# Altium PCB STM32.PcbDoc
Units mil, origin at the board's own origin, x right, y up, seen from the top; angles counter-clockwise.
Board outline 2100 x 900 mil, 2 copper layers (Top Layer, Bottom Layer); 35 components, 51 nets, 172 pads, 35 vias.
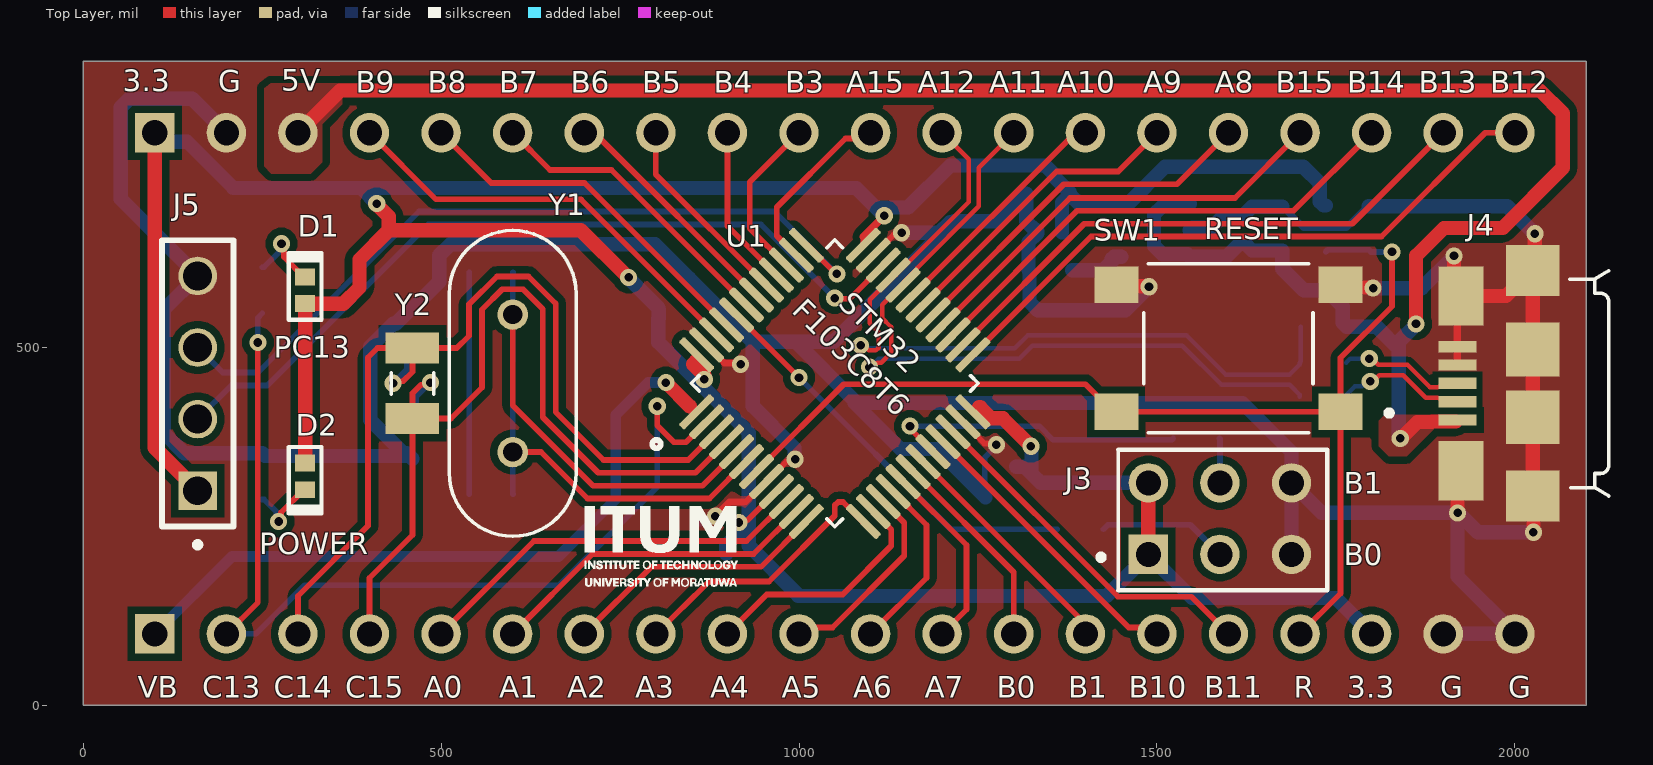
[diagram p0: Top Layer view]
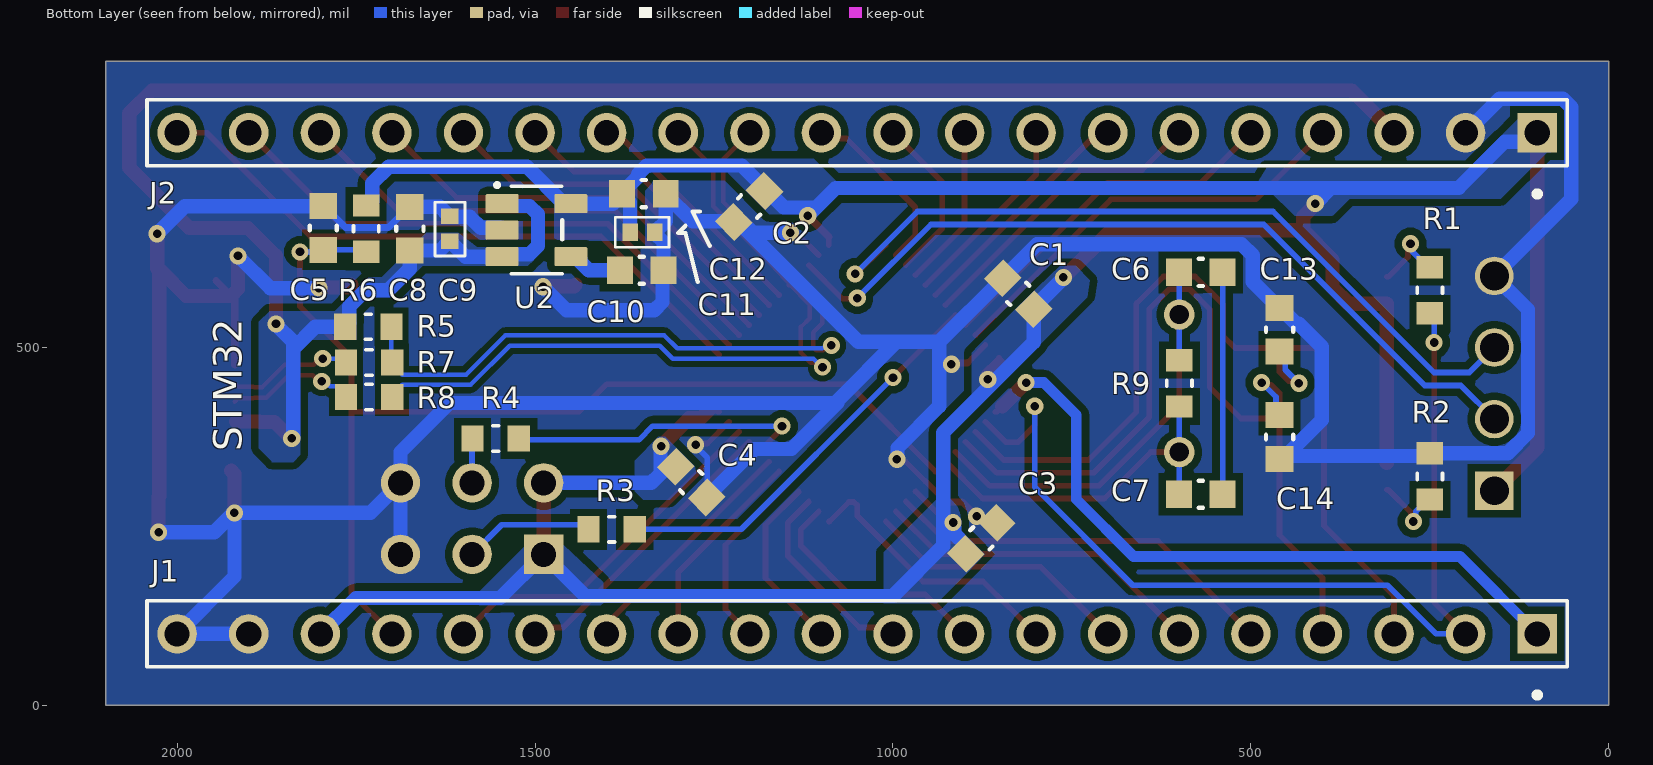
[diagram p1: Bottom Layer view, seen from below]
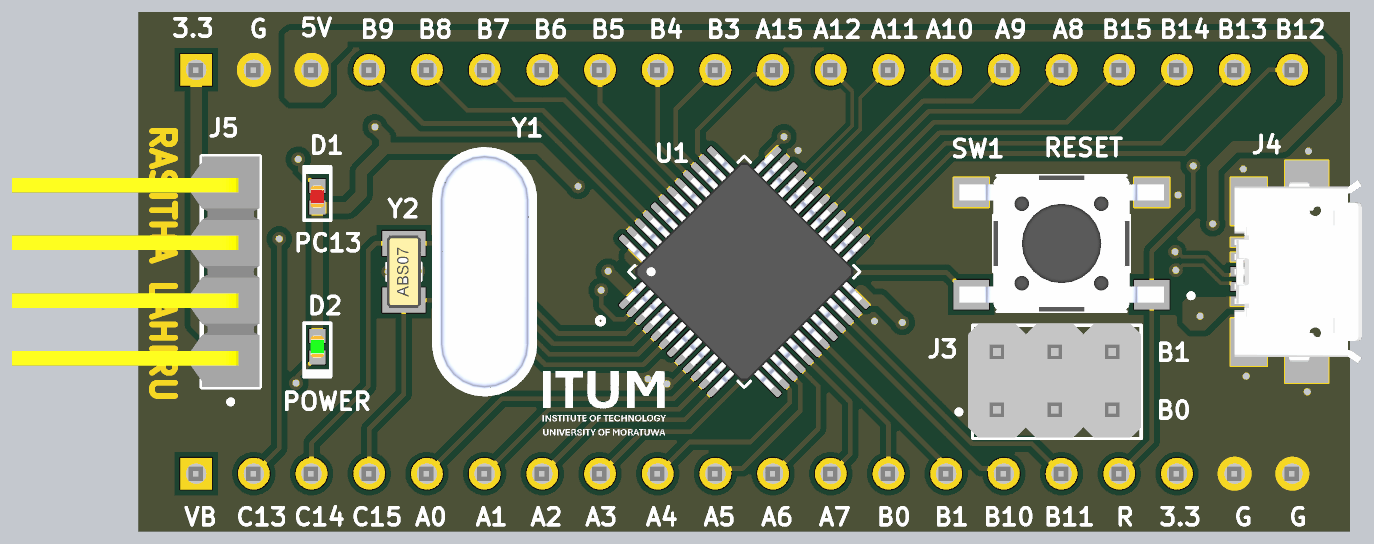
[diagram p2: 3D render of the assembled board from above, using the file's embedded part models]
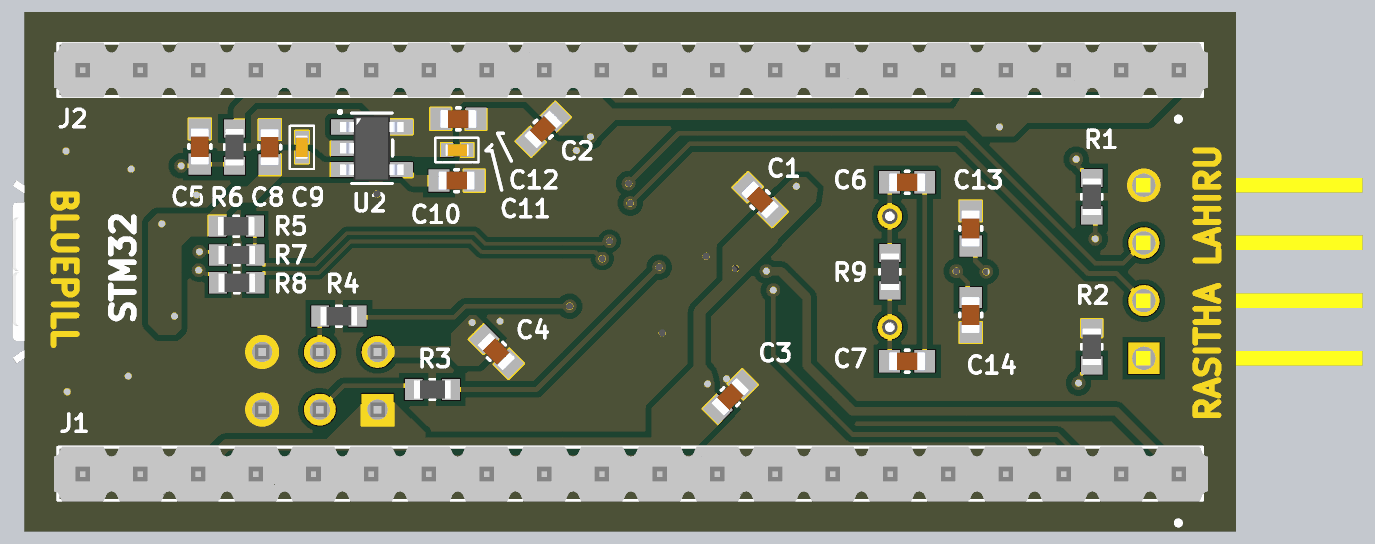
[diagram p3: 3D render of the assembled board from below, using the file's embedded part models]

## Layer stack, top to bottom
Top Solder: solder mask 0.4, Solder Resist, Dk 3.5
Top Layer: signal copper 1.4
Dielectric 1: dielectric 12.6, FR-4, Dk 4.8
Bottom Layer: signal copper 1.4
Bottom Solder: solder mask 0.4, Solder Resist, Dk 3.5

## Board outline
0,0 0,900 2100,900 2100,0

## Design rules (kind name [scope] priority, off if disabled: settings)
Clearance ITUM [WithinRoom('ITUM STK')] p1: gap=0 ignorepadtopadclearanceinfootprint=TRUE
Clearance Cleadiff [(InDifferentialPairClass('All Differential Pairs'))] p2: gap=8 ignorepadtopadclearanceinfootprint=TRUE
Clearance [All] p3: gap=10 ignorepadtopadclearanceinfootprint=TRUE except(6: SMDPad-SMDPad)
DiffPairsRouting [All] p1: maxlimit=8.33 minlimit=8 mostfreqgap=8.1 toplayer_minwidth=6.03 toplayer_maxwidth=6.33 toplayer_prefwidth=6.2 bottomlayer_minwidth=6.03 bottomlayer_maxwidth=6.33 bottomlayer_prefwidth=6.2 maxuncoupledlength=500
MinimumSolderMaskSliver [All] p1: minsoldermaskwidth=4
PolygonConnect [All] p1: connectstyle=Direct reliefconductorwidth=10 reliefentries=4 polygonreliefangle="90 Angle" airgapwidth=10
RoutingVias [All] p1: holewidth=12 width=24 viastyle="Through Hole" minholewidth=12 minwidth=24 maxholewidth=12 maxwidth=24
SilkToSolderMaskClearance ITUM_1 [WithinRoom('ITUM STK')] p1: minsilkscreentomaskgap=0 clearancetoexposedcopper=TRUE
SilkToSolderMaskClearance [IsPad] p2: minsilkscreentomaskgap=6 clearancetoexposedcopper=TRUE
SolderMaskExpansion [All] p1: expansion=2 istentingtop=FALSE
SupplyNets "Schematic Supply Nets_2" [InNet('5V')] p1: voltage=0.000
SupplyNets "Schematic Supply Nets_1" [InNet('3V3')] p2: voltage=0.000
SupplyNets "Schematic Supply Nets" [InNet('GND')] p3: voltage=0.000
Width [All] p1: maxlimit=100 minlimit=6 preferedwidth=10
27 further rules are at their usual default settings.

## Classes and differential pairs
differential pair USB: +USB_P -USB_N
differential pair D: +D_P -D_N

## Components (designator, comment, footprint, x,y, rotation, side; value= is the part's Value field where it differs from the comment)
C1 "104" "CAP 0603" 825,575 r225 bottom locked
C2 "104" "CAP 0603" 1201,697 r135 bottom locked
C3 "104" "CAP 0603" 876.58,233.42 r315 bottom locked
C4 "104" "CAP 0603" 1282,312 r45 bottom locked
C5 "105" "CAP 0603" 1796,667 r270 bottom locked
C6 "20p" "CAP 0603" 570,605 r0 bottom locked
C7 "20p" "CAP 0603" 570,295 r0 bottom locked
C8 "104" "CAP 0603" 1675,666 r270 bottom locked
C9 "105" "CAP 0805" 1619,666 r270 bottom locked
C10 "223" "CAP 0603" 1351,608 r0 bottom locked
C11 "105" "CAP 0805" 1350,661 r0 bottom locked
C12 "104" "CAP 0603" 1348,715 r0 bottom locked
C13 "20p" "CAP 0603" 460,525 r270 bottom locked
C14 "20p" "CAP 0603" 460,375 r90 bottom locked
D1 "red led" "RED LED" 310,580 r270 top locked
D2 "green led" "LED GREEN" 310,320 r90 top locked
J1 "20 header" "20*1 HEADER" 1050,100 r0 bottom locked
J2 "20 header" "20*1 HEADER" 1050,800 r0 bottom locked
J3 "2*3 header" "2*3 HEADER" 1488,311 r0 top locked
J4 "micro b usb" "MICRO-B USB" 2025,450 r90 top locked
J5 "4 header" "4 HEADER" 50,450 r270 top locked
R1 "510R" "RES 0603" 250,580 r270 bottom locked
R2 "510R" "RES 0603" 250,320 r90 bottom locked
R3 "100K" "RES 0603" 1393,246 r0 bottom locked
R4 "100K" "RES 0603" 1555,373 r180 bottom locked
R5 "4.7k" "RES 0603" 1733,529 r180 bottom locked
R6 "10K" "RES 0603" 1736,666 r90 bottom locked
R7 "20R" "RES 0603" 1732,479 r0 bottom locked
R8 "20R" "RES 0603" 1732,431 r0 bottom locked
R9 "10Mohm" "RES 0603" 600,450 r90 bottom locked
SW1 "button" BUTTON 1600,498 r180 top locked
U1 "stm32" STM32 1050,450 r45 top locked
U2 "reguleter" REGULETER 1498,664 r180 bottom locked
Y1 "8 MHz 22pf" "8MHZ CRISTAL" 600,450 r90 top locked
Y2 "32.768Khz" 32.768KHZ 460,450 r90 top locked

## Footprints (in the part's own frame and the unit in brackets; to place one, negate y for a bottom-side part, rotate by r counter-clockwise, add the part's x,y. Pads: shape width x height; smd on the part's side, far side on the other; paste and mask are expansions set on the pad)
"2*3 HEADER" [mm]
  rect 1.398x1.398 hole 0.89: 1(0,-2.54)
  round 1.398 hole 0.89: 2(0,0) 3(2.54,-2.54) 4(2.54,0) 5(5.08,-2.54) 6(5.08,0)
  silkscreen extent -1.78,-3.81 6.35,1.17, body extent -1.27,-3.77 6.35,1.23, height 8.61
"4 HEADER" [mm]
  rect 1.37x1.37 / inner round 1.37 / far side rect 1.37x1.37 hole 1.02: 1(3.81,2.79)
  round 1.37 hole 1.02: 2(1.27,2.79) 3(-1.27,2.79) 4(-3.81,2.79)
  silkscreen extent -5.08,1.52 5.83,4.06, body extent -5.08,-6.83 5.08,4.06, height 4.39
"8MHZ CRISTAL" [mm]
  round 1.08 hole 0.68: 1(-2.44,0) 2(2.44,0)
  silkscreen extent -5.43,-2.25 5.43,2.25, body extent -5.43,-2.25 5.43,2.25, height 3.68
"20*1 HEADER" [mm]
  rect 1.398x1.398 hole 0.89: 1(-24.13,0)
  round 1.398 hole 0.89: 2(-21.59,0) 3(-19.05,0) 4(-16.51,0) 5(-13.97,0) 6(-11.43,0) 7(-8.89,0) 8(-6.35,0) 9(-3.81,0) 10(-1.27,0) 11(1.27,0) 12(3.81,0) 13(6.35,0) 14(8.89,0) 15(11.43,0) 16(13.97,0) 17(16.51,0) 18(19.05,0) 19(21.59,0) 20(24.13,0)
  silkscreen extent -25.2,-1.17 25.2,2.27, body extent -25.43,-1.19 25.37,1.22, height 8.39
32.768KHZ [mm]
  rect 1.1x1.9 smd: 1(-1.25,0) 2(1.25,0)
  silkscreen extent -0.38,-0.75 0.38,0.75, body extent -1.6,-0.75 1.6,0.75, height 0.89
BUTTON [mm]
  rect 1.55x1.3 smd: 1(-3.975,2.225) 2(3.975,2.225) 3(-3.975,-2.275) 4(3.975,-2.275)
  silkscreen extent -5.8,-3.02 3,2.98, body extent -4.5,-3.02 4.5,2.98, height 4.3
"CAP 0603" [mm]
  rect 0.92x0.98 smd: 1(-0.775,0) 2(0.775,0)
  silkscreen extent -0.08,-0.48 0.08,0.48, body extent -0.8,-0.41 0.8,0.41, height 0.94
"CAP 0805" [mm] "Chip Capacitor, 2-Leads, Body 1.00x0.50mm, IPC Medium Density"
  rect 0.55x0.62 smd: 1(-0.44,0) 2(0.44,0)
  silkscreen extent -0.94,-0.53 0.97,0.53, body extent -0.53,-0.28 0.53,0.28, height 0.55
"LED GREEN" [mm]
  rect 0.6x0.7 smd: 1(-0.475,0) 2(0.475,0)
  silkscreen extent -1.32,-0.58 1.04,0.58, body extent -0.5,-0.3 0.5,0.3, height 0.21
"MICRO-B USB" [mm]
  rect 0.4x1.35 smd: 1(-1.3,2.675) 2(-0.65,2.675) 3(0,2.675) 4(0.65,2.675) 5(1.3,2.675)
  rect 2.1x1.6 smd: SH1(-3.1,2.55) SH2(3.1,2.55)
  rect 1.8x1.9 smd: SH3(-4,0) SH6(4,0)
  rect 1.9x1.9 smd: SH4(-1.2,0) SH5(1.2,0)
  silkscreen extent -4,-2.7 4,-1.32, body extent -4.04,-2.43 4.04,3.18, height 2.79
"RED LED" [mm]
  rect 0.6x0.7 smd: 1(-0.475,0) 2(0.475,0)
  silkscreen extent -1.32,-0.58 1.04,0.58, body extent -0.5,-0.3 0.5,0.3, height 0.21
REGULETER [mm]
  rrect12% 1.17x0.67 smd: 1(-1.22,0.94) 2(-1.22,0) 3(-1.22,-0.94) 4(1.22,-0.94) 5(1.22,0.94)
  silkscreen extent -1.47,-1.55 0.91,1.67, body extent -1.4,-1.45 1.4,1.45, height 1.3
"RES 0603" [mm]
  rect 0.79x0.93 smd: 1(-0.82,0) 2(0.82,0)
  silkscreen extent -0.11,-0.45 0.11,0.45, body extent -0.8,-0.4 0.8,0.4, height 0.55
STM32 [mm]
  rrect50% 1.56x0.28 smd: 1(-4.18,2.75) 2(-4.18,2.25) 3(-4.18,1.75) 4(-4.18,1.25) 5(-4.18,0.75) 6(-4.18,0.25) 7(-4.18,-0.25) 8(-4.18,-0.75) 9(-4.18,-1.25) 10(-4.18,-1.75) 11(-4.18,-2.25) 12(-4.18,-2.75) 25(4.18,-2.75) 26(4.18,-2.25) 27(4.18,-1.75) 28(4.18,-1.25) 29(4.18,-0.75) 30(4.18,-0.25) 31(4.18,0.25) 32(4.18,0.75) 33(4.18,1.25) 34(4.18,1.75) 35(4.18,2.25) 36(4.18,2.75)
  rrect50% 0.28x1.56 smd: 13(-2.75,-4.18) 14(-2.25,-4.18) 15(-1.75,-4.18) 16(-1.25,-4.18) 17(-0.75,-4.18) 18(-0.25,-4.18) 19(0.25,-4.18) 20(0.75,-4.18) 21(1.25,-4.18) 22(1.75,-4.18) 23(2.25,-4.18) 24(2.75,-4.18) 37(2.75,4.18) 38(2.25,4.18) 39(1.75,4.18) 40(1.25,4.18) 41(0.75,4.18) 42(0.25,4.18) 43(-0.25,4.18) 44(-0.75,4.18) 45(-1.25,4.18) 46(-1.75,4.18) 47(-2.25,4.18) 48(-2.75,4.18)
  silkscreen extent -6.15,-3.6 3.6,3.6, body extent -4.5,-4.5 4.5,4.5, height 1.6

## Part data
C1 C2 C3 C4 C8 C12: library part 104,0603, "0603"
C5: library part 105,0603, "0603"
C6 C7 C13 C14: library part 20p,0603, "0603"
C9 C11: library part 105,0805, "0805"
C10: library part 223,0603, "0603"
J4: library part "micro-b usb"
R1 R2 R3 R4 R6 R7 R8: "0603"
R5: library part 4.7k,0603, "0603"
R9: "10 MOhms ±5% 0.125W, 1/8W Chip Resistor 0805 (2012 Metric) High Voltage, Non-Magnetic Thick Film", JLCPCB Part #=C4095037, digkey=696-HVS0805-10MJ1CT-ND
SW1: library part "push button", "Keypad Switch, 0.05A, 12VDC, 2.55N, , Surface Mount-straight", Contact Current(DC)-Max=50mA, Contact DC Max Rating R Load=0.05A@12VDC, Contact Resistance=0.1mR, Contact Voltage(DC)-Max=12V, Dielectric Withstand Volts=250VACV, Insulation Resistance=100GR, LCSC part Number=C221871, Manufacturer="ITT C&K", Manufacturer Part Number=PTS645SK43SMTR92LFS, Manufacturer Series=PTS645, Max Operating Temperature=60°C, Min Operating Temperature=-20°C, Supplier Part Number=CKN9084CT-ND, Actuator Type=Pushbutton, Body Breadth=5.9944mm, Body Height=3.4544mm, Body Length or Diameter=5.9944mm, Category="Tactile Switches", ComponentLink1Description=https://datasheet.ciiva.com:443/pdfs/VipMasterIC/IC/CKCI/CKCI-S-A0001796527/CKCI-S-A0001796842-1.pdf?src-supplier=IHS+Markit, ComponentLink1URL=https://datasheet.ciiva.com:443/pdfs/VipMasterIC/IC/CKCI/CKCI-S-A0001796527/CKCI-S-A0001796842-1.pdf?src-supplier=IHS+Markit, ComponentLink2Description=https://datasheet.ciiva.com/14920/pts645-9sept14-14920736.pdf?src-supplier=Digikey, ComponentLink2URL=https://datasheet.ciiva.com/14920/pts645-9sept14-14920736.pdf?src-supplier=Digikey, ComponentLink3Description=https://datasheet.ciiva.com/29903/getdatasheetpartid-790637-29903897.pdf?src-supplier=Verical, ComponentLink3URL=https://datasheet.ciiva.com/29903/getdatasheetpartid-790637-29903897.pdf?src-supplier=Verical, ComponentLink4Description=https://datasheet.ciiva.com/22637/1707731-22637357.pdf?src-supplier=Element14, ComponentLink4URL=https://datasheet.ciiva.com/22637/1707731-22637357.pdf?src-supplier=Element14, JESD-609 Code=e4, Mounting Technology="Surface Mount", PCB Hole Count=4, Pricing="1=0.32, 10=0.275, 25=0.2576, 100=0.2307, 250=0.2138, 500=0.20176 (USD)", Reach SVHC Compliant=Yes, RoHS=Yes, RoHS Compliant=Yes, Stock=133695, Supplier=Digikey, Switch Action=MOMENTARY, Switch Function=SPST, Switch Type=Keypad, Terminal Finish=Silver, Terminal Length=0.138inch, Termination=Solder
U2: "Linear Voltage Regulator IC Positive Fixed 1 Output 300mA TSOT-23-5", Package="SOT-23-5 Richtek", Check_prices=https://www.snapeda.com/parts/RT9193-33GB/Richtek+USA+Inc./view-part/?ref=eda, Digi-Key_Part_Number=1028-1014-2-ND, MF="Richtek USA", MP=RT9193-33GB, Purchase-URL=https://pricing.snapeda.com/search/part/RT9193-33GB/?ref=eda, SnapEDA_Link=https://www.snapeda.com/parts/RT9193-33GB/Richtek+USA+Inc./view-part/?ref=snap
Y1: "8 MHz ±30ppm Crystal 22pF 80 Ohms HC-49/US", JLCPCB Part #=C6109242, digkey=9C-8.000MAAL-T-ND

## Via types
v1: diameter 24, hole 12, Top Layer to Bottom Layer, tented both sides, 35 vias

## Nets (pads, with @x,y where several pads share a name; then routed paths per layer and width w, separated by ;. In a path a pad name is that pad's centre, name@x,y a point inside that pad or via, vN(x,y) a via of type N, cw(c..) or ccw(c..) an arc to the next point about the centre after c; other vN are vias at no path point)
3V3: C1.2 C2.2 C3.2 C4.2 C11.2 C12.2 D1.2 D2.2 J1.18 J2.1 J3.1 J3.2 J5.1 R6.2 U1.9 U1.24 U1.36 U1.48 U2.5 | length 5300.9
  Top Layer w8: v1(916.02,255.6) 919.08,258.66 928.01,258.66 968.19,298.84 U1.9 ; U1.36 1089.81,654.81 ; U1.24 1242.99,410.13 1245.13,410.13 1252,417
  Top Layer w10: 852,484 852,484.73 ; 1089.81,654.81 v1(1119,684)
  Top Layer w20: J2.1 100,359.84 J5.1 ; D2.2 D1.2 363.3,561.3 386,584 386,623 427,664 ; v1(410,701) 410,699.92 427,682.92 427,664 ; v1(762,598) 761,598 695,664 427,664 ; 852,476.66 867.55,461.11 v1(867.55,455.55) ; 1252,417 1253,417 1269,401 1285,401 v1(1324,362) ; J3.1 J3.2
  Bottom Layer w10: 1140.28,696.58 1153.42,696.58
  Bottom Layer w20: J2.1 112.33,787.67 145.13,787.67 209.84,722.96 387,722.96 ; v1(410,701) 388.04,722.96 387,722.96 ; v1(762,598) 762,596.92 803.42,555.49 C1.2 804.26,552.59 804.26,541.12 803.42,540.28 803.42,507.58 930,381 930,223 998.94,154.06 998.94,153 1430,153 J3.1 1548.91,150.09 1749.91,150.09 J1.18 ; C3.2 898.15,223.32 915.25,240.42 915.25,254.83 v1(916.02,255.6) ; v1(1119,684) 1107.26,695.74 ; C4.2 1315.04,333.58 1326.33,322.29 ; v1(1324,362) 1324.77,361.23 1324.77,323.85 1326.33,322.29 ; C11.2 1367.32,702.63 1378.51,713.82 1391.32,701.01 U2.5 1459.81,701.01 1511.28,752.48 1704.52,752.48 1727.69,729.31 1727.69,703.83 1733.24,698.28 R6.2 ; C12.2 1378.51,716.18 1356.26,738.43 1356.26,741.91 1343.88,754.29 1211.14,754.29 1153.42,696.58 1152.59,695.74 1107.26,695.74 ; J3.2 1337.62,311 1326.33,322.29 ; 387,722.96 1080.04,722.96 1107.26,695.74
5V: C8.2 C9.2 J2.3 J4.1 R5.1 U2.1 U2.3 | length 3037.9
  Top Layer w20: J2.3 359,859 2035.28,859 2067,827.28 2067,751 1983,667 1901,667 1862,628 v1(1862,533) ; v1(1840,373) 1841.08,373 1864.08,396 1884,396 1884.69,396.69 J4.1@1917.56,396.69
  Bottom Layer w20: U2.1 1542.84,697.82 1507.82,697.82 1496,686 1496,642 1507.82,630.18 1542.84,630.18 U2.3 1597.32,626.99 1616.8,646.47 1616.8,647.85 1617.62,648.68 C9.2 ; C9.2@1620.38,648.68 1621.2,647.85 1621.2,647.2 1632.92,635.49 C8.2 1675,610 1705,580 1737,580 1759.73,557.27 1759.73,534.55 R5.1 1807,529 1838,498 ; v1(1840,373) 1838,375 1838,507.92 1862,531.92 v1(1862,533)
BOOT0: R3.1 U1.44 | length 572.2
  Top Layer w8: U1.44 912.75,545.37 1000,458.12 v1(1000,458)
  Bottom Layer w8: v1(1000,458) 1212,246 R3.1
BOOT1: R4.2 U1.20 | length 425.5
  Top Layer w8: v1(1155.01,390.16) 1155.01,387 1187.25,354.76 U1.20
  Bottom Layer w8: v1(1155.01,390.16) 1335.84,390.16 1355,371 1520.72,371 R4.2
D_N: J4.2 R8.2 | length 184.9
  Top Layer w6.33: v1(1798.13,452.61) 1801.9,452.61 1810.67,461.38 1844.11,461.38 1875.5,429.99 1892.57,429.99 1893.44,429.12 1914.98,429.12 J4.2
  Bottom Layer w6.33: R8.2 1764.28,433.76 1776.67,446.14 1786.88,446.14 1793.35,452.61 v1(1798.13,452.61)
D_P: J4.3 R7.2 | length 176.7
  Top Layer w6.33: v1(1796.76,484.58) 1800.53,484.58 1809.3,475.81 1850.08,475.81 1881.48,444.42 1892.57,444.42 1893.44,445.29 1914.98,445.29 J4.3
  Bottom Layer w6.33: R7.2 1769.87,484.58 v1(1796.76,484.58)
GND: C1.1 C2.1 C3.1 C4.1 C5.1 C8.1 C9.1 C10.1 C11.1 C12.1 C13.1 C14.1 J1.19 J1.20 J2.2 J3.5 J3.6 J4.4 J4.5 J4.SH1 J4.SH2 J4.SH3 J4.SH4 J4.SH5 J4.SH6 J5.4 R2.2 SW1.3 SW1.4 U1.8 U1.23 U1.35 U1.47 U2.2 | length 6780.7
  Top Layer w8: U1.47@871,503.48 889.76,484.72 895.48,479 ; 922,284 925.51,284 954.27,312.75 U1.8 982.57,340.81 991.5,340.81 v1(994.56,343.87) ; U1.35 1131.93,657.21 1140.28,657.21 v1(1143.35,660.27) ; U1.23 1259.2,366.07 1273.85,366.07 v1(1275.76,364.16)
  Top Layer w10: v1(883.17,264.37) 902.8,284 922,284 ; 895.48,479 896.3,478.18 916.91,478.18 v1(918.35,476.73) ; J4.4 J4.5 1919.68,567.13 J4.SH2 J4.SH2@1946,593.44
  Top Layer w20: SW1.4 1445.31,585.77 1488.23,585.77 v1(1489,585) ; SW1.3 1760.3,583.77 1801.23,583.77 v1(1802,583) ; v1(1915,628) 1915,581.65 J4.SH2 1987.6,572.05 2023.03,607.48 J4.SH6 ; v1(1920,269) 1920,323.35 J4.SH1 ; v1(2026,242) 2026,291.52 J4.SH3 J4.SH4 J4.SH5 J4.SH6 ; v1(2028,659) 2028,610.48 J4.SH6
  Bottom Layer w8: C4.1 1259.59,291.26 1259.59,346.39 1275.76,362.57 v1(1275.76,364.16)
  Bottom Layer w10: C3.1 873.54,255 882.91,264.37 v1(883.17,264.37) ; C8.1 1676.18,696.51 1704.96,667.73 1765.04,667.73 1794.82,697.51 C5.1
  Bottom Layer w20: J2.2 152.48,847.52 64.2,847.52 52.48,835.8 52.48,707.36 J5.4 112.87,553.03 112.87,380.55 141.14,352.28 R2.2 253.9,348.39 456.1,348.39 C14.1 451.89,352.6 447.23,352.6 401,398.83 401,501.17 433.09,533.26 436.57,533.26 458.82,555.51 C13.1 461.18,555.51 497.58,591.91 497.58,628.77 513.09,644.29 798.86,644.29 C1.1 ; C1.1@847.41,595.74 935.27,507.88 ; v1(994.56,343.87) 993.79,344.63 993.79,359.63 935.27,418.15 935.27,507.88 ; v1(1143.35,660.27) 1195.95,660.27 1211.11,675.42 C2.1 ; C4.1 1192.69,358.16 1141.75,358.16 1077.5,422.41 ; v1(1489,585) 1456,552 1333.72,552 1322,563.72 1322,606.49 C10.1 1320.49,647.43 1332.68,659.62 C11.1 1332.68,662.38 1330.58,664.47 1329.2,664.47 1317.49,676.19 C12.1 1317.49,713.82 1279.93,676.26 1216.83,676.26 1048.45,507.88 995.38,507.88 ; U2.2 1549.22,667.19 1575.79,667.19 1591.1,682.5 1618.17,682.5 C9.1 1620.38,683.32 1621.2,684.15 1621.2,684.8 1632.92,696.51 C8.1 ; J3.5 J3.6 ; C5.1 1989.49,697.51 v1(2028,659) ; v1(1802,583) 1870,583 v1(1915,628) ; J1.19 J1.20 1920,180 v1(1920,269) ; v1(2026,242) 1948.08,242 1921.08,269 v1(1920,269) ; 935.27,507.88 995.38,507.88 ; 995.38,507.88 1077.5,425.75 1077.5,422.41 ; 1077.5,422.41 1619.59,422.41 1688,354 J3.6 ; J3.6 1730,269 v1(1920,269)
NetC6_1: C6.1 C7.1 | length 310
  Bottom Layer w8: C7.1 C6.1
NetC10_2: C10.2 U2.4 | length 78.7
  Bottom Layer w20: C10.2 1425.22,608 1436.94,619.72 1436.94,623.8 1440.13,626.99 U2.4
NetD1_1: D1.1 R1.1 | length 106.6
  Top Layer w8: v1(277,645) 280.38,641.62 280.38,626.35 308.03,598.7 D1.1
  Bottom Layer w8: R1.1 252.76,612.28 273.62,633.15 273.62,641.62 v1(277,645)
NetD2_1: D2.1 R2.1 | length 102.6
  Top Layer w8: v1(273,257) 276.38,260.38 276.38,269.65 308.03,301.3 D2.1
  Bottom Layer w8: R2.1 252.76,287.72 269.62,270.85 269.62,260.38 v1(273,257)
NetJ3_3: J3.3 R3.2 | length 182.6
  Bottom Layer w8: R3.2 1431.8,252.52 1546.48,252.52 J3.3
NetJ3_4: J3.4 R4.1 | length 62.3
  Bottom Layer w8: R4.1 1588,372.28 J3.4
OSC32_IN: C13.2 J1.3 U1.3 Y2.2 | length 1320
  Top Layer w8: J1.3 300,153 398,251 398,486 411.21,499.21 Y2.2 ; v1(433,450) 436.06,453.06 447.06,453.06 460,466 Y2.2 ; U1.3 884.67,382.35 845.32,343 727,343 660,410 660,561.38 622.06,599.32 577.94,599.32 539,560.38 539,516.26 521.95,499.21 Y2.2
  Bottom Layer w8: v1(433,450) 452.06,469.06 452.06,486.55 C13.2
OSC32_OUT: C14.2 J1.4 U1.4 Y2.1 | length 1238.2
  Top Layer w8: J1.4 400,178 460,238 Y2.1 ; v1(485,451) 481.94,447.94 471.94,447.94 460,436 Y2.1 ; U1.4 855.4,325 719.54,325 642,402.54 642,553.93 614.61,581.32 585.39,581.32 557,552.93 557,444 513.79,400.79 Y2.1
  Bottom Layer w8: C14.2 464.94,410.45 464.94,430.94 v1(485,451)
OSC_IN: C6.2 R9.2 U1.5 Y1.2 | length 628.8
  Top Layer w8: Y1.2 600,419.09 712.09,307 865.24,307 U1.5
  Bottom Layer w8: R9.2 Y1.2 600,604.49 C6.2
OSC_OUT: C7.2 R9.1 U1.6 Y1.1 | length 497.9
  Top Layer w8: Y1.1 639.7,353.94 704.63,289 874.84,289 926.43,340.59 U1.6
  Bottom Layer w8: R9.1 Y1.1 600,295.51 C7.2
PA0: J1.5 U1.10 | length 558.9
  Top Layer w8: J1.5 629.6,229.6 926.79,229.6 982.11,284.92 U1.10
PA1: J1.6 U1.11 | length 467.1
  Top Layer w8: J1.6 711.6,211.6 936.63,211.6 996.03,271 U1.11
PA2: J1.7 U1.12 | length 375.3
  Top Layer w8: J1.7 793.6,193.6 946.71,193.6 U1.12
PA3: J1.8 U1.13 | length 385.7
  Top Layer w8: J1.8 874.18,173 958,173 1050,265 1050,279.65 1054.69,284.34 1061.31,284.34 1088.58,257.08 U1.13
PA4: J1.9 U1.14 | length 338.4
  Top Layer w8: J1.9 955,155 1061,155 1129,223 1129,245.73 U1.14
PA5: J1.10 U1.15 | length 280.2
  Top Layer w8: J1.10 1009,109 1047,109 1147,209 1147,255.32 1117.65,284.67 U1.15
PA6: J1.11 U1.16 | length 250.4
  Top Layer w8: J1.11 1178,178 1178,252.16 1131.57,298.59 U1.16
PA7: J1.12 U1.17 | length 263.5
  Top Layer w8: U1.17 1145.49,312.51 1234,224 1234,134 J1.12
PA8: J2.16 U1.29 | length 518.2
  Top Layer w8: U1.29 1369.76,728 1528,728 J2.16
PA9: J2.15 U1.30 | length 426.3
  Top Layer w8: U1.30 1359.92,746 1446,746 J2.15
PA10: J2.14 U1.31 | length 334.5
  Top Layer w8: U1.31 1377.08,791 1391,791 J2.14
PA15: J2.11 U1.38 | length 252.4
  Top Layer w8: U1.38 969,656.27 969,696 1065.06,792.06 1092.06,792.06 J2.11
PB0: J1.13 U1.18 | length 284.9
  Top Layer w8: U1.18 1300,186.08 J1.13
PB1: J1.14 U1.19 | length 334.5
  Top Layer w8: U1.19 1391,122.92 1391,109 J1.14
PB3: J2.10 U1.39 | length 234.8
  Top Layer w8: U1.39 982.35,615.33 931,666.68 931,731 J2.10
PB4: J2.9 U1.40 | length 227.2
  Top Layer w8: J2.9 900,669.84 968.43,601.41 U1.40
PB5: J2.8 U1.41 | length 276.8
  Top Layer w8: J2.8 800,741.76 U1.41
PB6: J2.7 U1.42 | length 334.5
  Top Layer w8: J2.7 709,791 722.92,791 U1.42
PB7: J2.6 U1.43 | length 426.3
  Top Layer w8: J2.6 652,748 738.08,748 U1.43
PB8: J2.5 U1.45 | length 510
  Top Layer w8: J2.5 570,730 700.4,730 U1.45
PB9: J2.4 U1.46 | length 601.9
  Top Layer w8: J2.4 493,707 695.32,707 884.67,517.65 U1.46
PB10: J1.15 U1.21 | length 410
  Top Layer w8: U1.21 1460.6,109 1491,109 J1.15
PB11: J1.16 U1.22 | length 501.9
  Top Layer w8: U1.22 1445.44,152 1548,152 J1.16
PB12: J2.20 U1.25 | length 885.6
  Top Layer w8: U1.25 1408.11,655 1813.72,655 1958.72,800 J2.20
PB13: J2.19 U1.26 | length 793.7
  Top Layer w8: U1.26 1229.25,503.73 1398.52,673 1773,673 J2.19
PB14: J2.18 U1.27 | length 701.9
  Top Layer w8: U1.27 1388.44,691 1691,691 J2.18
PB15: J2.17 U1.28 | length 610
  Top Layer w8: U1.28 1378.6,709 1609,709 J2.17
PC13: J1.2 R1.2 U1.2 | length 1385.8
  Top Layer w8: J1.2 244,144 v1(244,507) ; v1(802,418) 802,390.98 825.19,367.79 842.27,367.79 870.75,396.27 U1.2
  Bottom Layer w8: J1.2 241.28,100 309.28,168 665,168 802,305 v1(802,418) ; v1(244,507) 244,541.72 R1.2
RESET: C5.2 J1.17 R6.1 SW1.1 SW1.2 U1.7 | length 1563.8
  Top Layer w8: U1.7 1062.58,448.66 1400.32,448.66 1438.58,410.4 SW1.2 SW1.1 ; J1.17 1756.5,156.5 SW1.1 ; v1(1828.43,633.57) 1828.43,557.52 1756.5,485.58 SW1.1
  Bottom Layer w8: R6.1 1738.77,636.49 C5.2 1798.92,633.57 v1(1828.43,633.57)
SWCLK: J5.3 U1.37 | length 1096.1
  Top Layer w8: U1.37 1011.52,642.92 1051.56,602.88 v1(1052.89,602.88)
  Bottom Layer w8: J5.3 194.84,465 244,465 469,690 965.77,690 v1(1052.89,602.88)
SWIO: J5.2 U1.34 | length 1133.1
  Top Layer w8: v1(1050,569) 1051,568 1070.56,568 U1.34
  Bottom Layer w8: J5.2 206.84,447 257,447 482,672 947,672 v1(1050,569)
USB_N: J2.13 R8.1 U1.32 | length 1072.6
  Top Layer w6.33: v1(1098.5,472.66) 1103.28,472.66 1109.5,478.88 1114.68,478.88 1128.54,492.74 1128.54,528.71 1116.23,541.02 1116.23,559.65 1143.83,587.25 U1.32 1145.49,590.56 1165.46,610.54 1165.46,611.47 1251.33,697.34 1251.33,751.33 J2.13
  Bottom Layer w6.33: v1(1098.5,472.66) 1099.39,472.66 1111.04,484.31 1307.55,484.31 1325.68,502.45 1535.49,502.45 1590.16,447.78 1685.69,447.78 1699.72,433.76 R8.1
USB_P: J2.12 R5.2 R7.1 U1.33 | length 1113.8
  Top Layer w6.33: v1(1086,503) 1090.78,503 1097.57,496.21 1107.49,496.21 1111.2,499.92 1111.2,521.53 1098.89,533.84 1098.89,566.83 1131.57,599.51 U1.33 1134.89,601.16 1237,703.28 1237,763 J2.12
  Bottom Layer w6.33: v1(1086,503) 1089.38,499.62 1097.67,499.62 1098.54,498.74 1301.57,498.74 1319.71,516.88 1541.47,516.88 1596.14,462.22 1685.69,462.22 1699.72,476.24 R7.1 1700.72,480 R5.2
VBAT: J1.1 U1.1 | length 988.4
  Top Layer w8: 847.5,417.5 854.87,410.13 857.01,410.13 U1.1
  Top Layer w20: v1(814,451) 814.25,451 847.5,417.75 847.5,417.5
  Bottom Layer w15: J1.1 208,208 664,208 744,288 744,405.57 789.43,451 v1(814,451)

## Polygon pours and split planes (outlines as drawn)
GND on Bottom Layer "GND_L02_P015" (solid, remove dead copper, pour order 15): 0,0 0,900 2100,900 2100,0
5V on Bottom Layer "5V_L02_P011" (solid, pour order 11): 1828,387 1828,350 1838,340 1868,340 1868,341 1886,359 1886,536 1871,551 1780,551 1733,598 1714,598 1652,660 1607,660 1581,640 1574,640 1520,640 1502,622 1510,614 1657,614 1658,613 1701,570 1715,570 1735.64,570 1759.73,545.91 1750,536.18 1750,511 1812,511 1829,494 1829,493
3V3 on Bottom Layer "3V3_L02_P009" (solid, pour order 9): 801,581 798,584 766,614 745,614 725,594 728.5,570.5 733,566 864,435 890,435 890,493 880,503
3V3 on Bottom Layer "3V3_L02_P007" (solid, pour order 7): 1467.11,649.06 1357,648.94 1357,724 1334,747 1340,753 1339.92,762.5 1524.52,761.48 1527,759 1473,705 1473,653
3V3 on Bottom Layer "3V3_L02_P006" (solid, pour order 6): 1080,733 1111,764 1211,764 1231,744 1173,686 1117,686 1113.13,689.87
3V3 on Bottom Layer "3V3_L02_P005" (solid, pour order 5): 74,773 86,773 151,708 461,708 489.15,733.22 478,751 195,751 125,821
3V3 on Bottom Layer "3V3_L02_P004" (solid, pour order 4): 341,713 357,713 386,684 439,684 475,720 470,725 343,725
3V3 on Bottom Layer "3V3_L02_P003" (solid, pour order 3): 1439,140 1436,140 1578,140 1578,159 1513,224 1460,224 1405,172 1405,143 1408,140 1442,140
3V3 on Bottom Layer "3V3_L02_P002" (solid, pour order 2): 897,185 939,143 1013,143 1013,214 939,288 919,288 910,278 907,269 904.44,258.52 904,243 872,211
3V3 on Bottom Layer "3V3_L02_P001" (solid, pour order 1): 1277,334 1318,375 1328,375 1361,342 1361,299 1349,287 1312,287 1274.6,324.4
GND on Top Layer "GND_L01_P014" (solid, remove dead copper, pour order 14): 0,0 0,900 2100,900 2100,0
5V on Top Layer "5V_L01_P012" (solid, pour order 12): 362,849 362,840 334,812 334,759 318,743 263,743 253,753 253,862 262,869 264,869 416,869
5V on Top Layer "5V_L01_P010" (solid, pour order 10): 1834,406 1835,406 1887,406 1887,386 1849,348 1824,348 1810,362 1810,398 1818,406

## Silkscreen, mask and mechanical layers (free items; w line width, h text height)
Top Overlay:
  drawing of 43 lines, arcs and shapes, not listed
  text "5V" at 277,859 h30
  text "3.3" at 55,858 h30
  text "G" at 189,857 h30
  text "B9" at 381,856 h30
  text "B8" at 481,856 h30
  text "B7" at 581,856 h30
  text "B6" at 681,856 h30
  text "B5" at 781,856 h30
  text "B4" at 881,856 h30
  text "B3" at 981,856 h30
  text "A15" at 1066,856 h30
  text "A12" at 1166,856 h30
  text "A11" at 1266,856 h30
  text "A10" at 1361,856 h30
  text "A9" at 1481,856 h30
  text "A8" at 1581,856 h30
  text "B15" at 1666,856 h30
  text "B14" at 1766,856 h30
  text "B13" at 1866,856 h30
  text "B12" at 1966,856 h30
  text "RESET" at 1566,651 h30
  text "STM32" at 1053.49,560 h30 r315
  text "F103C8T6" at 988.49,550 h30 r315
  text "PC13" at 266,486 h30
  text "B1" at 1761,296 h30
  text "POWER" at 246,211 h30
  text "B0" at 1761,196 h30
  text "VB" at 76,11 h30
  text "C13" at 166,11 h30
  text "C14" at 266,11 h30
  text "C15" at 366,11 h30
  text "A0" at 476,11 h30
  text "A1" at 581,11 h30
  text "A2" at 676,11 h30
  text "A3" at 771,11 h30
  text "A4" at 876,11 h30
  text "A5" at 976,11 h30
  text "A6" at 1076,11 h30
  text "A7" at 1176,11 h30
  text "B0" at 1276,11 h30
  text "B1" at 1376,11 h30
  text "B10" at 1461,11 h30
  text "B11" at 1566,11 h30
  text "R" at 1691,11 h30
  text "3.3" at 1766,11 h30
  text "G" at 1896,11 h30
  text "G" at 1991,11 h30
Bottom Overlay:
  lines w6: 1256,642 1280,690 1270,690 ; 1272.94,591.76 1290,660 1300,660 1290,670
  text "STM32" at 1910,355 h40 r270
Top Solder:
  text "RASITHA LAHIRU" at 23,710 h40 r270
Bottom Solder:
  text "BLUEPILL" at 2050,600 h40 r90
  text "RASITHA LAHIRU" at 30,185 h40 r270

## Text inside footprints (layer, text, board x,y; h text height)
J4: Top 3D Body "PCB Edge" at 2175,300 h40.07 r90